# EAGLE board Terminierung_RS485_RJ45_routed (EAGLE 8.5.1)
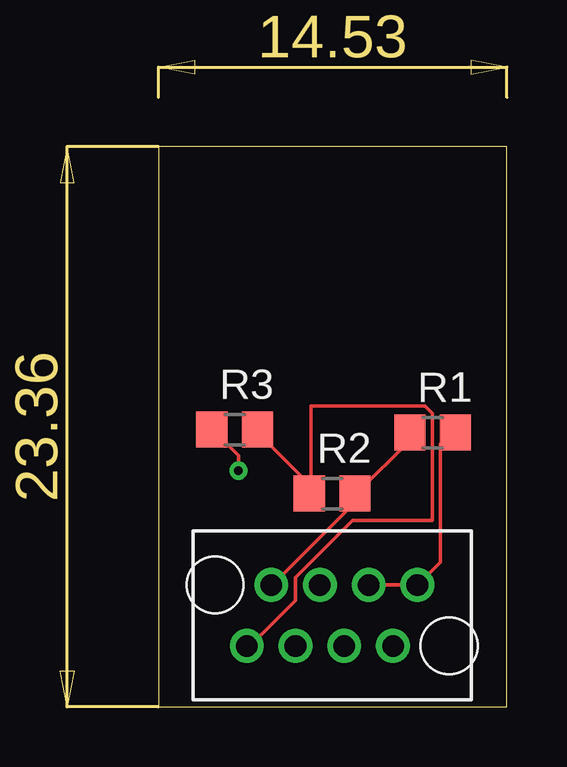
[diagram p0: board, top side]
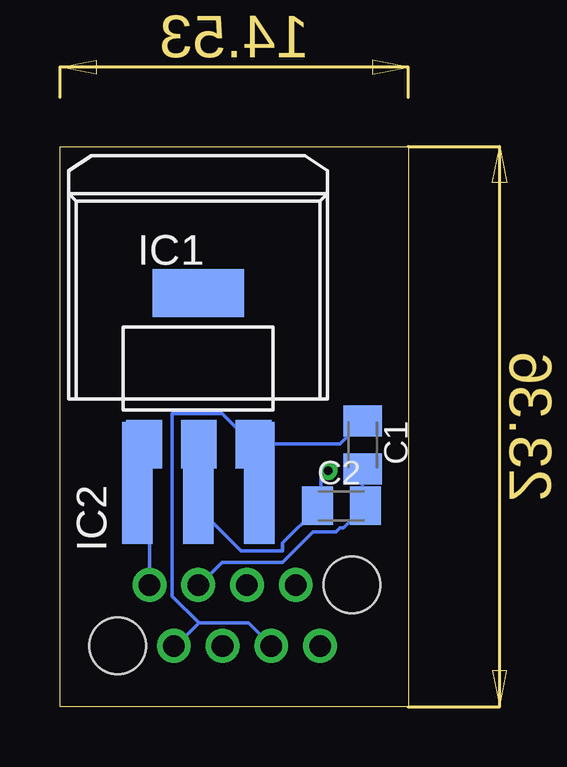
[diagram p1: board, bottom side, seen from below]

Size 14.53 x 23.36 mm. Coordinates in mm from the lower left corner, seen from the top.
Outline: 0,0 14.53,0 14.53,23.36 0,23.36 0,0
Copper layers (1*16): Top 0.035mm / dielectric 1.5mm / Bottom 0.035mm
Design rules "default": minimum track width 6mil, minimum drill 0.35mm, track to track 6mil, track to pad 6mil, pad to pad 6mil, via to via 6mil, smd to smd 6mil, copper to edge 40mil, drill to drill 6mil, minimum pad ring 10mil, minimum via ring 8mil, stop-mask expansion 4mil, vias tented up to drill 0mil, thermal gap 10mil

## Footprints (pad centres in the part's own frame; a part is rotated, then mirrored left to right if it is on the bottom)
C0805K = smd 1.3 x 1.6: 1 -1,0; 2 1,0
SOT223 = smd 1.499 x 2.007: 1 -2.261,-3.15; 2 0.025,-3.15; 3 2.311,-3.15 | smd 3.81 x 2.007: 4 0,3.15
DD-3 = smd 1.27 x 5.08: 1 -2.54,-7.938; 2 0,-7.938; 3 2.54,-7.938
R0805 = smd 1.3 x 1.5: 1 -0.95,0; 2 0.95,0
RJ45_PLUG = drill 0.9: 1 -3.556,-1.27; 2 -2.54,1.27; 3 -1.524,-1.27; 4 -0.508,1.27; 5 0.508,-1.27; 6 1.524,1.27; 7 2.54,-1.27; 8 3.556,1.27 | hole 2.36: -4.88,1.27; 4.88,-1.27

## Placement (x,y rotation side)
C1  10uF  [C0805K]  1.91,10.92 270 bottom
C2  100uF  [C0805K]  2.79,8.38 0 bottom
IC1  REG1117  [SOT223]  8.76,14.1 0 bottom
IC2  REG1117F  [DD-3]  8.76,17.27 0 bottom
R1  330  [R0805]  11.43,11.43 0 top
R2  150  [R0805]  7.24,8.89 0 top
R3  330  [R0805]  3.17,11.56 0 top
U$1  RJ45_PLUG  [RJ45_PLUG]  7.24,3.81 0 top

## Library data of the parts
C1 C2 R1-R3 = resistor
IC1 = burr-brown; MPN: REG1117; OC_FARNELL: 1097566; OC_NEWARK: 14P6981
IC2 = burr-brown; MF: TEXAS INSTRUMENTS; MPN: REG1117FAKTTT; OC_FARNELL: 1296120; OC_NEWARK: 87H2562
U$1 = MetzConnect_RJ45_Plug

## Nets
GND: C1.2 C2.2 IC1.1 IC2.1 R1.2 U$1.6 U$1.8
N$3: R1.1 R2.2 U$1.2
N$4: R2.1 R3.2 U$1.1
VCC: C1.1 IC1.3 IC2.3 U$1.3 U$1.7
VOUT: C2.1 IC1.2 IC2.2 R3.1

## Tracks (layer width: path | path; a pad name or v marks a point on that pad's centre or on a via)
GND
  Top 0.152: R1.2 12.22,11.43 11.75,10.95 11.75,6.03 U$1.8 U$1.6
  Bottom 0.152: IC1.1 11.11,10.79 11.11,9.37 11.27,9.37 IC2.1 11.27,9.21 10.79,8.73 U$1.8 | C1.2 1.91,8.41 C2.2 1.91,8.26 2.7,7.46 2.86,7.46 3.02,7.3 3.97,7.3 5.24,6.03 7.78,6.03 8.73,5.08 U$1.6
N$3
  Top 0.152: R1.1 10.48,11.11 8.26,8.89 R2.2 8.1,8.89 8.1,8.41 4.76,5.08 U$1.2
N$4
  Top 0.152: R3.2 4.13,11.43 6.19,9.37 6.19,8.89 R2.1 6.35,8.89 6.35,12.54 11.11,12.54 11.43,12.22 11.43,7.78 8.1,7.78 5.71,5.4 5.71,4.45 3.81,2.54 U$1.1
VCC
  Bottom 0.152: U$1.3 6.67,3.49 8.73,3.49 | 8.73,3.49 9.68,2.54 U$1.7 | 6.35,10.95 2.86,10.95 1.91,11.91 C1.1 | 6.35,10.95 IC1.3 6.51,10.95 7.78,12.22 9.84,12.22 9.84,4.6 8.73,3.49 | 6.35,10.95 IC2.3
VOUT  (via drill 0.35)
  Top 0.152: v3.33,9.84 3.33,10.48 2.38,11.43 R3.1
  Bottom 0.152: v3.33,9.84 3.65,9.53 3.65,8.41 C2.1 3.81,8.26 5.24,6.83 5.24,6.51 6.99,6.51 8.73,8.26 8.73,9.21 IC2.2 8.73,9.37 8.73,10.79 IC1.2